# EAGLE board ZX81ExpCard (EAGLE 5.11)
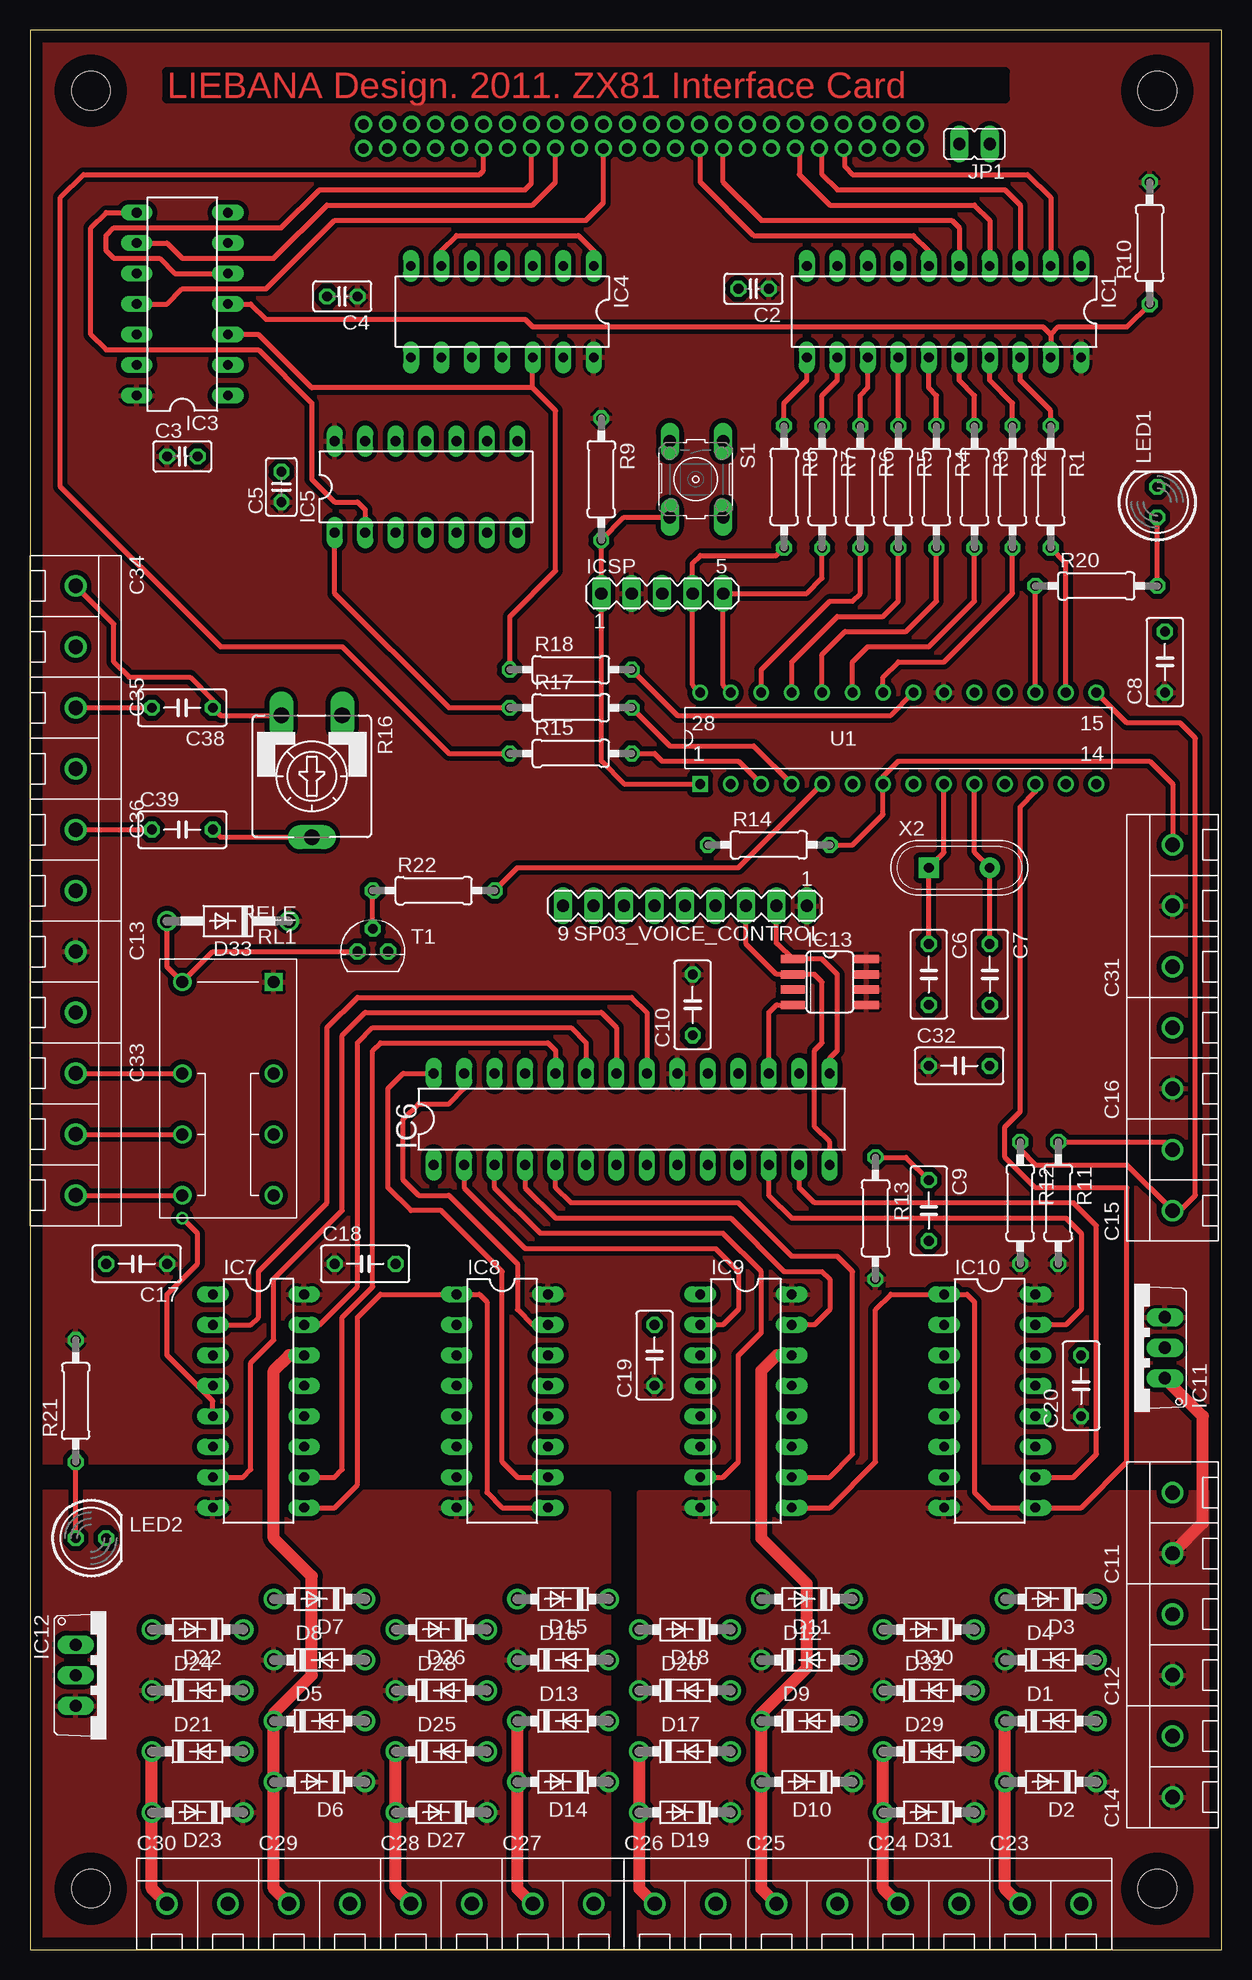
[diagram p0: board, top side]
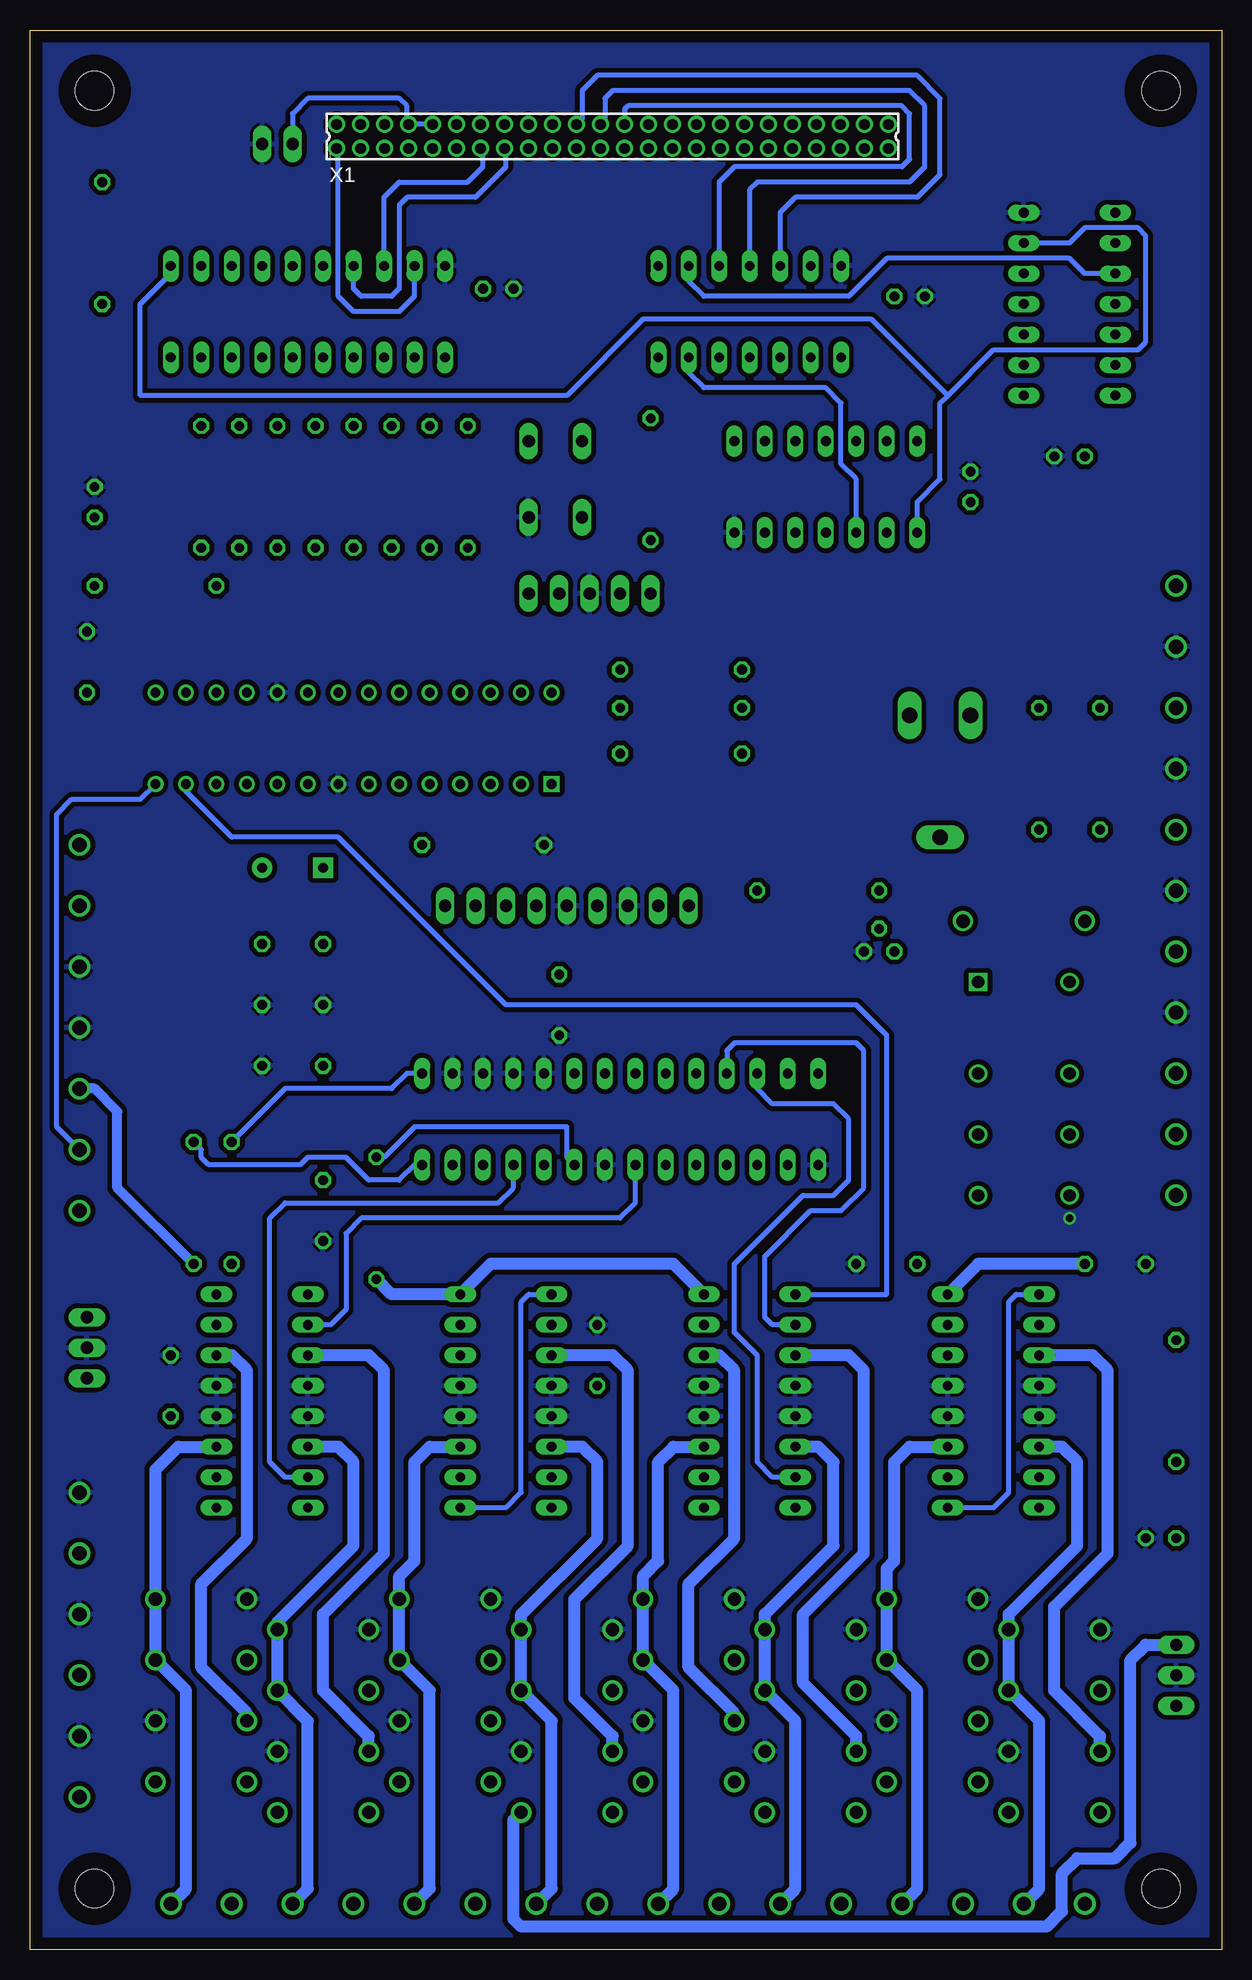
[diagram p1: board, bottom side, seen from below]

Size 99.36 x 160 mm. Coordinates in mm from the lower left corner, seen from the top.
Outline: 0,0 99.36,0 99.36,160 0,160 0,0
Copper layers (1*16): Top 0.035mm / dielectric 1.5mm / Bottom 0.035mm
Design rules "default *": minimum track width 16mil, minimum drill 24mil, track to track 16mil, track to pad 16mil, pad to pad 16mil, via to via 16mil, smd to smd 8mil, copper to edge 40mil, drill to drill 8mil, minimum pad ring 10mil, minimum via ring 8mil, stop-mask expansion 8mil, vias tented up to drill 0mil, thermal gap 10mil
Holes 3.2 mm at 5.08,5.08 93.98,5.08 93.98,154.94 5.08,154.94
tRestrict: area 2.1,2.1 to 8.1,8.1; area 91,2.1 to 97,8.1; area 91,151.9 to 97,157.9; area 2.1,151.9 to 8.1,157.9
bRestrict: area 2.1,2.1 to 8.1,8.1; area 91,2.1 to 97,8.1; area 91,151.9 to 97,157.9; area 2.1,151.9 to 8.1,157.9

## Footprints (pad centres in the part's own frame; a part is rotated, then mirrored left to right if it is on the bottom)
C025-025X050 = drill 0.813 octagon: 1 -1.27,0; 2 1.27,0
C050-030X075 = drill 0.813 octagon: 1 -2.54,0; 2 2.54,0
C2P = drill 1.2 pad 1.676 round: 1 0,0; 2 5.08,0
C3P = drill 1.2 pad 1.676 round: 1 0,0; 2 5.08,0; 3 10.16,0
DO41-7.6 = drill 1.1 pad 1.7 round: A 3.81,0; C -3.81,0
DO41-10 = drill 1.118 round: A 5.08,0; C -5.08,0
DIL20 = drill 0.813 long: 1 -11.43,-3.81; 2 -8.89,-3.81; 3 -6.35,-3.81; 4 -3.81,-3.81; 5 -1.27,-3.81; 6 1.27,-3.81; 7 3.81,-3.81; 8 6.35,-3.81; 9 8.89,-3.81; 10 11.43,-3.81; 11 11.43,3.81; 12 8.89,3.81; 13 6.35,3.81; 14 3.81,3.81; 15 1.27,3.81; 16 -1.27,3.81; 17 -3.81,3.81; 18 -6.35,3.81; 19 -8.89,3.81; 20 -11.43,3.81
DIL14 = drill 0.813 long: 1 -7.62,-3.81; 2 -5.08,-3.81; 3 -2.54,-3.81; 4 0,-3.81; 5 2.54,-3.81; 6 5.08,-3.81; 7 7.62,-3.81; 8 7.62,3.81; 9 5.08,3.81; 10 2.54,3.81; 11 0,3.81; 12 -2.54,3.81; 13 -5.08,3.81; 14 -7.62,3.81
DIL28-3 = drill 0.813 long: 1 -16.51,-3.81; 2 -13.97,-3.81; 3 -11.43,-3.81; 4 -8.89,-3.81; 5 -6.35,-3.81; 6 -3.81,-3.81; 7 -1.27,-3.81; 8 1.27,-3.81; 9 3.81,-3.81; 10 6.35,-3.81; 11 8.89,-3.81; 12 11.43,-3.81; 13 13.97,-3.81; 14 16.51,-3.81; 15 16.51,3.81; 16 13.97,3.81; 17 11.43,3.81; 18 8.89,3.81; 19 6.35,3.81; 20 3.81,3.81; 21 1.27,3.81; 22 -1.27,3.81; 23 -3.81,3.81; 24 -6.35,3.81; 25 -8.89,3.81; 26 -11.43,3.81; 27 -13.97,3.81; 28 -16.51,3.81
DIL16 = drill 0.813 long: 1 -8.89,-3.81; 2 -6.35,-3.81; 3 -3.81,-3.81; 4 -1.27,-3.81; 5 1.27,-3.81; 6 3.81,-3.81; 7 6.35,-3.81; 8 8.89,-3.81; 9 8.89,3.81; 10 6.35,3.81; 11 3.81,3.81; 12 1.27,3.81; 13 -1.27,3.81; 14 -3.81,3.81; 15 -6.35,3.81; 16 -8.89,3.81
TO220V = drill 1.016 long: 1 -2.54,-2.54; 2 0,-2.54; 3 2.54,-2.54
SO08 = smd 0.66 x 2.032: 1 -1.905,-3.073; 2 -0.635,-3.073; 3 0.635,-3.073; 4 1.905,-3.073; 5 1.905,3.073; 6 0.635,3.073; 7 -0.635,3.073; 8 -1.905,3.073
MA05-1 = drill 1.016 long: 1 -5.08,0; 2 -2.54,0; 3 0,0; 4 2.54,0; 5 5.08,0
JP2 = drill 1.016 long: 1 0,0; 2 2.54,0
LED5MM = drill 0.813 octagon: A -1.27,0; K 1.27,0
0207/10 = drill 0.813 octagon: 1 -5.08,0; 2 5.08,0
CA9V = drill 1.321 long: A -2.54,-5.08; E 2.54,-5.08; S 0,5.08
RELE = drill 1.016 square: 1 0,0 | drill 1.016 round: 2 0,7.62; 3 0,12.7; 4 0,17.78; 5 7.62,17.78; 6 7.62,12.7; 7 7.62,7.62; 8 7.62,0
PULSADOR-PEQUEÑO = drill 1.016 long: 1 0,0; 2 6.35,0; 3 0,-4.445; 4 6.35,-4.445
MA09-1 = drill 1.016 long: 1 -10.16,0; 2 -7.62,0; 3 -5.08,0; 4 -2.54,0; 5 0,0; 6 2.54,0; 7 5.08,0; 8 7.62,0; 9 10.16,0
TO92 = drill 0.813 octagon: 1 1.27,0; 2 0,1.905; 3 -1.27,0
DIL28 = drill 0.813 square: 1 0,0 | drill 0.813 round: 2 2.54,0; 3 5.08,0; 4 7.62,0; 5 10.16,0; 6 12.7,0; 7 15.24,0; 8 17.78,0; 9 20.32,0; 10 22.86,0; 11 25.4,0; 12 27.94,0; 13 30.48,0; 14 33.02,0; 15 33.02,7.62; 16 30.48,7.62; 17 27.94,7.62; 18 25.4,7.62; 19 22.86,7.62; 20 20.32,7.62; 21 17.78,7.62; 22 15.24,7.62; 23 12.7,7.62; 24 10.16,7.62; 25 7.62,7.62; 26 5.08,7.62; 27 2.54,7.62; 28 0,7.62
87758-4816 = drill 0.9 pad 1.27 round: 1 -23,-1; 2 -23,1; 3 -21,-1; 4 -21,1; 5 -19,-1; 6 -19,1; 7 -17,-1; 8 -17,1; 9 -15,-1; 10 -15,1; 11 -13,-1; 12 -13,1; 13 -11,-1; 14 -11,1; 15 -9,-1; 16 -9,1; 17 -7,-1; 18 -7,1; 19 -5,-1; 20 -5,1; 21 -3,-1; 22 -3,1; 23 -1,-1; 24 -1,1; 25 1,-1; 26 1,1; 27 3,-1; 28 3,1; 29 5,-1; 30 5,1; 31 7,-1; 32 7,1; 33 9,-1; 34 9,1; 35 11,-1; 36 11,1; 37 13,-1; 38 13,1; 39 15,-1; 40 15,1; 41 17,-1; 42 17,1; 43 19,-1; 44 19,1; 45 21,-1; 46 21,1; 47 23,-1; 48 23,1
XTAL-R = drill 0.813 pad 1.676 square: 1 0,0 | drill 0.813 pad 1.676 round: 2 5.08,0

## Placement (x,y rotation side)
C2  100nF  [C025-025X050]  60.33,138.43 180 top
C3  100nF  [C025-025X050]  12.7,124.46 0 top
C4  100nF  [C025-025X050]  26.04,137.79 180 top
C5  100nF  [C025-025X050]  20.95,121.92 90 top
C6  22pF  [C050-030X075]  74.93,81.28 270 top
C7  22pF  [C050-030X075]  80.01,81.28 270 top
C8  100nF  [C050-030X075]  94.61,107.31 90 top
C9  33pF  [C050-030X075]  74.93,61.59 270 top
C10  100nF  [C050-030X075]  55.24,78.74 90 top
C11  IN 12V  [C2P]  95.25,33.02 90 top
C12  OUT 12V ZX81  [C2P]  95.25,22.86 90 top
C13  OUT 5V Cassette  [C2P]  3.81,83.19 270 top
C14  OUT 12V Multipurpose  [C2P]  95.25,12.7 90 top
C15  I2C  [C2P]  95.25,61.59 90 top
C16  +5V I2C  [C2P]  95.25,71.75 90 top
C17  100nF  [C050-030X075]  8.89,57.15 180 top
C18  100nF  [C050-030X075]  27.94,57.15 0 top
C19  100nF  [C050-030X075]  52.07,49.53 90 top
C20  100nF  [C050-030X075]  87.63,46.99 90 top
C23  MOTOR8  [C2P]  82.55,3.81 0 top
C24  MOTOR7  [C2P]  72.39,3.81 0 top
C25  MOTOR6  [C2P]  62.23,3.81 0 top
C26  MOTOR5  [C2P]  52.07,3.81 0 top
C27  MOTOR4  [C2P]  41.91,3.81 0 top
C28  MOTOR3  [C2P]  31.75,3.81 0 top
C29  MOTOR2  [C2P]  21.59,3.81 0 top
C30  MOTOR1  [C2P]  11.43,3.81 0 top
C31  PIR  [C3P]  95.25,81.92 90 top
C32  100nF  [C050-030X075]  77.47,73.66 0 top
C33  RELAY  [C3P]  3.81,73.03 270 top
C34  TO AMPLIFIER  [C2P]  3.81,113.67 270 top
C35  SP03_VOICE_AUDIO  [C2P]  3.81,103.5 270 top
C36  TAPE_AUDIO  [C2P]  3.81,93.34 270 top
C38  100nF  [C050-030X075]  12.7,103.5 180 top
C39  100nF  [C050-030X075]  12.7,93.34 0 top
D1  1N5817-B  [DO41-7.6]  85.09,19.05 0 top
D2  1N5817-B  [DO41-7.6]  85.09,13.97 180 top
D3  1N5817-B  [DO41-7.6]  85.09,29.21 180 top
D4  1N5817-B  [DO41-7.6]  85.09,24.13 0 top
D5  1N5817-B  [DO41-7.6]  24.13,19.05 0 top
D6  1N5817-B  [DO41-7.6]  24.13,13.97 180 top
D7  1N5817-B  [DO41-7.6]  24.13,29.21 180 top
D8  1N5817-B  [DO41-7.6]  24.13,24.13 0 top
D9  1N5817-B  [DO41-7.6]  64.77,19.05 0 top
D10  1N5817-B  [DO41-7.6]  64.77,13.97 180 top
D11  1N5817-B  [DO41-7.6]  64.77,29.21 180 top
D12  1N5817-B  [DO41-7.6]  64.77,24.13 0 top
D13  1N5817-B  [DO41-7.6]  44.45,19.05 0 top
D14  1N5817-B  [DO41-7.6]  44.45,13.97 180 top
D15  1N5817-B  [DO41-7.6]  44.45,29.21 180 top
D16  1N5817-B  [DO41-7.6]  44.45,24.13 0 top
D17  1N5817-B  [DO41-7.6]  54.61,16.51 0 top
D18  1N5817-B  [DO41-7.6]  54.61,26.67 180 top
D19  1N5817-B  [DO41-7.6]  54.61,11.43 180 top
D20  1N5817-B  [DO41-7.6]  54.61,21.59 0 top
D21  1N5817-B  [DO41-7.6]  13.97,16.51 0 top
D22  1N5817-B  [DO41-7.6]  13.97,26.67 180 top
D23  1N5817-B  [DO41-7.6]  13.97,11.43 180 top
D24  1N5817-B  [DO41-7.6]  13.97,21.59 0 top
D25  1N5817-B  [DO41-7.6]  34.29,16.51 0 top
D26  1N5817-B  [DO41-7.6]  34.29,26.67 180 top
D27  1N5817-B  [DO41-7.6]  34.29,11.43 180 top
D28  1N5817-B  [DO41-7.6]  34.29,21.59 0 top
D29  1N5817-B  [DO41-7.6]  74.93,16.51 0 top
D30  1N5817-B  [DO41-7.6]  74.93,26.67 180 top
D31  1N5817-B  [DO41-7.6]  74.93,11.43 180 top
D32  1N5817-B  [DO41-7.6]  74.93,21.59 0 top
D33  1N4004  [DO41-10]  16.51,85.72 180 top
IC1  74HC245N  [DIL20]  76.2,136.53 180 top
IC3  74AC04N  [DIL14]  12.7,137.16 90 top
IC4  74LS11N  [DIL14]  39.37,136.53 180 top
IC5  7432N  [DIL14]  33.02,121.92 0 top
IC6  MCP23016DIL28  [DIL28-3]  50.16,69.22 0 top
IC7  L293D  [DIL16]  19.05,45.72 270 top
IC8  L293D  [DIL16]  39.37,45.72 270 top
IC9  L293D  [DIL16]  59.69,45.72 270 top
IC10  L293D  [DIL16]  80.01,45.72 270 top
IC11  7805TV  [TO220V]  92.08,50.16 90 top
IC12  7805TV  [TO220V]  6.35,22.86 270 top
IC13  STLM75M2F  [SO08]  66.67,80.64 270 top
ICSP  [MA05-1]  52.7,113.03 0 top
JP1  [JP2]  80.01,150.5 180 top
LED1  [LED5MM]  93.98,120.65 90 top
LED2  [LED5MM]  5.08,34.29 0 top
R1  100R  [0207/10]  85.09,121.92 270 top
R2  100R  [0207/10]  81.92,121.92 270 top
R3  100R  [0207/10]  78.74,121.92 270 top
R4  100R  [0207/10]  75.56,121.92 270 top
R5  100R  [0207/10]  72.39,121.92 270 top
R6  100R  [0207/10]  69.22,121.92 270 top
R7  100R  [0207/10]  66.04,121.92 270 top
R8  100R  [0207/10]  62.87,121.92 270 top
R9  4K7  [0207/10]  47.62,122.56 270 top
R10  4K7  [0207/10]  93.34,142.24 90 top
R11  4K7  [0207/10]  85.72,62.23 270 top
R12  4K7  [0207/10]  82.55,62.23 270 top
R13  3K9  [0207/10]  70.48,60.96 270 top
R14  10K  [0207/10]  61.59,92.08 0 top
R15  100R  [0207/10]  45.09,99.69 0 top
R16  10K  [CA9V]  23.5,97.79 180 top
R17  100R  [0207/10]  45.09,103.5 0 top
R18  100R  [0207/10]  45.09,106.68 0 top
R20  330R  [0207/10]  88.9,113.67 0 top
R21  330R  [0207/10]  3.81,45.72 90 top
R22  1K  [0207/10]  33.66,88.27 0 top
RL1  RELE  [RELE]  20.32,80.64 180 top
S1  [PULSADOR-PEQUEÑO]  57.78,125.73 270 top
SP03_VOICE_CONTROL  [MA09-1]  54.61,87 180 top
T1  BC547  [TO92]  28.57,83.19 0 top
U1  PIC18F2620  [DIL28]  55.88,97.16 0 top
X1  87758-4816  [87758-4816]  50.8,151.13 0 bottom
X2  20Mhz  [XTAL-R]  74.93,90.17 0 top

## Library data of the parts
C2-C10 C17-C20 C32 C38 C39 R1-R15 R17 R18 R20-R22 = rcl
C11-C16 C23-C31 C33-C36 JP1 RL1 S1 U1 = IEARobotics
D1-D33 = diode
IC1 IC3 IC4 = 74xx-eu
IC5 = 74xx-us
IC6 IC13 X2 = cruiser-consola
IC7-IC10 = st-microelectronics; MPN: L293D; OC_FARNELL: 9589619; OC_NEWARK: 56P8249
IC11 IC12 = linear
ICSP SP03_VOICE_CONTROL = con-lstb; OC_FARNELL: unknown; OC_NEWARK: unknown
LED1 LED2 = led
R16 = pot
T1 = transistor
X1 = con-molex; MPN: 87758-4816; OC_FARNELL: unknown; OC_NEWARK: 25M5696

## Nets
!MCLR: ICSP.1 R9.2 S1.4 U1.1
!MREQ: IC3.11 X1.27
!RD: IC3.9 X1.31
!WAIT: R15.1 X1.37
!WR: IC3.5 X1.33
+5V: C2.1 C3.1 C4.1 C5.1 C8.1 C10.2 C13.1 C16.1 C17.1 C18.1 C19.1 C20.1 C31.2 C32.1 D33.C IC1.20 IC3.14 IC4.14 IC5.14 IC6.20 IC7.16 IC8.16 IC9.16 IC10.16 IC11.3 IC13.5 IC13.6 IC13.7 IC13.8 ICSP.2 R9.1 R10.2 R11.2 R12.2 R13.2 R21.2 RL1.1 SP03_VOICE_CONTROL.1 U1.20
+12V: C11.1 C12.1 C14.1 D2.C D4.C D10.C D12.C D19.C D20.C D31.C D32.C IC9.8 IC10.8 IC11.1 IC12.1
ADR_BUS0: X1.14
ADR_BUS1: X1.16
ADR_BUS2: X1.18
ADR_BUS3: X1.20
ADR_BUS4: X1.44
ADR_BUS5: X1.42
ADR_BUS6: X1.40
ADR_BUS7: X1.38
ADR_BUS8: X1.36
ADR_BUS9: X1.34
ADR_BUS10: X1.32
ADR_BUS11: X1.30
ADR_BUS12: X1.28
ADR_BUS13: IC4.3 X1.26
ADR_BUS14: IC4.4 X1.24
ADR_BUS15: IC4.5 X1.22
DATA_BUS0: IC1.2 X1.7
DATA_BUS1: IC1.3 X1.9
DATA_BUS2: IC1.4 X1.11
DATA_BUS3: IC1.5 X1.17
DATA_BUS4: IC1.6 X1.19
DATA_BUS5: IC1.7 X1.15
DATA_BUS6: IC1.8 X1.13
DATA_BUS7: IC1.9 X1.1
DATA_LINE0: R1.2 U1.16
DATA_LINE1: R2.2 U1.22
DATA_LINE2: R3.2 U1.23
DATA_LINE3: R4.2 U1.24
DATA_LINE4: R5.2 U1.25
DATA_LINE5: R6.2 U1.26
DATA_LINE6: ICSP.5 R7.2 U1.27
DATA_LINE7: ICSP.4 R8.2 U1.28
GND: C2.2 C3.2 C4.2 C5.2 C6.2 C7.2 C8.2 C9.2 C10.1 C11.2 C12.2 C13.2 C14.2 C16.2 C17.2 C18.2 C19.2 C20.2 C31.1 C32.2 C34.2 C35.2 C36.2 D1.A D3.A D5.A D7.A D9.A D11.A D13.A D15.A D17.A D18.A D21.A D22.A D25.A D26.A D29.A D30.A IC1.10 IC3.7 IC4.7 IC5.7 IC6.1 IC6.8 IC6.16 IC6.17 IC6.18 IC6.19 IC7.4 IC7.5 IC7.12 IC7.13 IC8.4 IC8.5 IC8.12 IC8.13 IC9.4 IC9.5 IC9.12 IC9.13 IC10.4 IC10.5 IC10.12 IC10.13 IC11.2 IC12.2 IC13.4 ICSP.3 JP1.1 LED1.K LED2.K R14.1 S1.2 SP03_VOICE_CONTROL.5 SP03_VOICE_CONTROL.7 T1.1 U1.8 U1.19
LED: R20.1 U1.17
M1+: C30.1 D21.C D23.A IC7.3
M1-: C30.2 D22.C D24.A IC7.6
M2+: C29.1 D5.C D6.A IC7.14
M2-: C29.2 D7.C D8.A IC7.11
M3+: C28.1 D25.C D27.A IC8.3
M3-: C28.2 D26.C D28.A IC8.6
M4+: C27.1 D13.C D14.A IC8.14
M4-: C27.2 D15.C D16.A IC8.11
M5+: C26.1 D17.C D19.A IC9.3
M5-: C26.2 D18.C D20.A IC9.6
M6+: C25.1 D9.C D10.A IC9.14
M6-: C25.2 D11.C D12.A IC9.11
M7+: C24.1 D29.C D31.A IC10.3
M7-: C24.2 D30.C D32.A IC10.6
M8+: C23.1 D1.C D2.A IC10.14
M8-: C23.2 D3.C D4.A IC10.11
N$1: IC1.18 R1.1
N$2: IC1.17 R2.1
N$3: IC1.16 R3.1
N$4: IC1.15 R4.1
N$5: IC1.14 R5.1
N$6: IC1.13 R6.1
N$7: IC1.12 R7.1
N$8: IC1.11 R8.1
N$9: IC3.10 IC4.2
N$10: C6.1 U1.9 X2.1
N$11: C7.1 U1.10 X2.2
N$12: C9.1 IC6.9 R13.1
N$13: IC1.19 IC3.4 R10.1
N$14: IC4.1 IC4.6
N$15: JP1.2 X1.8 X1.10
N$16: LED2.A R21.1
N$19: D33.A RL1.8 T1.3
N$20: R22.1 T1.2
N$21: C33.3 RL1.5
N$22: IC3.8 IC5.2
N$23: IC4.13 IC5.3
N$24: C33.2 RL1.6
N$25: C33.1 RL1.7
N$26: C36.1 C39.1
N$27: C39.2 R16.S
N$28: C35.1 C38.2
N$29: LED1.A R20.2
N$30: C34.1 C38.1 R16.E
N$68: IC1.1 IC3.6 IC5.1 R17.1
N$70: IC3.3 IC4.12 R18.1
PIR_SIGNAL: C31.3 R14.2 U1.7
PWM1: IC7.1 IC7.9 IC8.1 IC8.9 U1.13
PWM2: IC9.1 IC9.9 IC10.1 IC10.9 U1.12
RELAY: R22.2 U1.5
S1M1: IC6.21 IC7.2
S1M2: IC6.23 IC7.15
S1M3: IC6.25 IC8.2
S1M4: IC6.27 IC8.15
S1M5: IC6.2 IC9.2
S1M6: IC6.4 IC9.15
S1M7: IC6.7 IC10.2
S1M8: IC6.12 IC10.15
S2M1: IC6.22 IC7.7
S2M2: IC6.24 IC7.10
S2M3: IC6.26 IC8.7
S2M4: IC6.28 IC8.10
S2M5: IC6.3 IC9.7
S2M6: IC6.5 IC9.10
S2M7: IC6.11 IC10.7
S2M8: IC6.13 IC10.10
SCL: C15.2 IC6.14 IC13.2 R11.1 SP03_VOICE_CONTROL.3 U1.14
SDA: C15.1 IC6.15 IC13.1 R12.1 SP03_VOICE_CONTROL.2 U1.15
VCC: D6.C D8.C D14.C D16.C D23.C D24.C D27.C D28.C IC7.8 IC8.8 IC12.3
ZX81_DIR: R17.2 U1.4
ZX81_READY: R18.2 U1.21
ZX81_WAIT: R15.2 U1.3

## Tracks (layer width: path | path; a pad name or v marks a point on that pad's centre or on a via)
!MCLR
  Top 0.406: S1.4 49.53,119.38 R9.2 ICSP.1 47.62,99.06 49.53,97.16 U1.1
!MREQ
  Top 0.406: IC3.11 11.43,137.16 12.7,138.43 19.68,138.43 25.4,144.15 46.35,144.15 47.8,145.59 X1.27
!RD
  Top 0.406: IC3.9 11.43,142.24 12.7,140.97 20.32,140.97 24.77,145.41 41.91,145.41 43.8,147.31 X1.31
!WAIT
  Top 0.406: X1.37 37.8,148.29 37.47,147.96 4.45,147.96 2.54,146.05 2.54,121.92 15.88,108.58 26.04,108.58 34.92,99.69 R15.1
!WR
  Top 0.406: IC3.5 12.06,139.7 10.79,140.97 6.99,140.97 6.35,141.6 6.35,142.88 6.99,143.51 20.95,143.51 24.13,146.69 41.27,146.69 41.8,147.21 X1.33
+5V
  Bottom 0.813: R11.2 92.08,63.5 92.08,69.85 93.98,71.75 C16.1
  Bottom 1.016: IC7.16 20.32,57.15 C17.1 | R13.2 69.22,54.61 IC9.16 60.96,57.15 45.72,57.15 IC8.16
  pour Top: -1.91,40.64 101.6,40.64 101.6,162.56 -1.91,162.56
+12V
  Top 1.016: IC11.1 97.79,44.45 97.79,35.56 C11.1
  Bottom 1.016: IC12.1 6.35,25.4 7.62,24.13 7.62,8.89 8.89,7.62 12.06,7.62 13.34,6.35 13.34,3.17 14.61,1.91 58.42,1.91 59.05,2.54 59.05,10.79 D19.C
  pour Top: 100.97,-3.17 50.8,-3.17 50.8,38.1 100.97,38.1
ADR_BUS13
  Bottom 0.406: IC4.3 41.91,147.32 40.64,148.59 26.67,148.59 26.04,149.22 26.04,153.03 26.67,153.67 49.53,153.67 49.8,153.4 X1.26
ADR_BUS14
  Bottom 0.406: IC4.4 39.37,146.69 38.73,147.32 26.04,147.32 24.77,148.59 24.77,153.67 26.04,154.94 50.8,154.94 51.44,154.31 51.44,152.5 X1.24
ADR_BUS15
  Bottom 0.406: IC4.5 36.83,144.78 35.56,146.05 25.4,146.05 23.5,147.96 23.5,154.31 25.4,156.21 52.07,156.21 53.34,154.94 53.34,152.59 X1.22
DATA_BUS0
  Top 0.406: IC1.2 85.09,146.05 83.19,147.96 68.58,147.96 67.94,148.59 67.94,149.99 X1.7
DATA_BUS1
  Top 0.406: IC1.3 82.55,145.41 81.28,146.69 67.31,146.69 66.04,147.96 66.04,149.89 X1.9
DATA_BUS2
  Top 0.406: IC1.4 80.01,144.15 78.74,145.41 66.67,145.41 64.14,147.96 64.14,149.79 X1.11
DATA_BUS3
  Top 0.406: IC1.5 77.47,143.51 76.83,144.15 60.96,144.15 57.78,147.32 57.78,150.12 X1.17
DATA_BUS4
  Top 0.406: IC1.6 74.93,141.6 73.66,142.88 60.33,142.88 55.88,147.32 55.88,150.05 X1.19
DATA_BUS5
  Bottom 0.406: IC1.7 72.39,138.43 71.75,137.79 69.22,137.79 68.58,138.43 68.58,145.41 67.94,146.05 62.23,146.05 59.69,148.59 59.69,150.02 X1.15
DATA_BUS6
  Bottom 0.406: IC1.8 69.85,146.05 68.58,147.32 62.87,147.32 61.59,148.59 61.59,149.93 X1.13
DATA_BUS7
  Bottom 0.406: IC1.9 67.31,137.79 68.58,136.53 72.39,136.53 73.66,137.79 73.66,149.99 X1.1
DATA_LINE0
  Top 0.406: R1.2 86.36,115.57 U1.16
DATA_LINE1
  Top 0.406: U1.22 71.12,106.05 72.39,107.31 76.2,107.31 81.92,113.03 R2.2
DATA_LINE2
  Top 0.406: R3.2 78.74,112.39 74.93,108.58 69.85,108.58 68.58,107.31 U1.23
DATA_LINE3
  Top 0.406: U1.24 66.04,107.95 67.94,109.86 73.03,109.86 75.56,112.39 R4.2
DATA_LINE4
  Top 0.406: R5.2 72.39,112.39 71.12,111.12 67.31,111.12 63.5,107.31 U1.25
DATA_LINE5
  Top 0.406: R6.2 69.22,113.03 68.58,112.39 66.67,112.39 60.96,106.68 U1.26
DATA_LINE6
  Top 0.406: U1.27 57.78,105.41 ICSP.5 64.77,113.03 66.04,114.3 R7.2
DATA_LINE7
  Top 0.406: R8.2 62.23,116.2 55.88,116.2 55.24,115.57 ICSP.4 55.24,105.41 U1.28
GND  (via drill 0.61)
  Top 0.406: IC13.4 62.23,78.74 61.59,78.11 IC6.17 | v12.7,60.96 13.97,59.69 13.97,57.15 11.43,54.61 11.43,49.53 15.24,45.72 IC7.5
  pour Bottom: -2.54,163.19 104.14,163.19 104.14,-5.08 -2.54,-5.08
LED
  Top 0.406: U1.17 R20.1
M1+
  Top 1.016: C30.1 10.16,5.08 D23.A D21.C
  Bottom 1.016: D21.C 10.16,17.78 13.97,21.59 13.97,28.57 9.53,33.02 9.53,48.26 10.79,49.53 IC7.3
M1-
  Bottom 1.016: C30.2 15.24,5.08 15.24,19.05 D24.A D22.C 17.78,27.94 12.06,33.66 12.06,40.64 13.34,41.91 IC7.6
M2+
  Top 1.016: C29.1 20.32,5.08 D6.A D5.C 20.32,19.68 23.5,22.86 23.5,31.11 20.32,34.29 20.32,48.26 21.59,49.53 IC7.14
M2-
  Bottom 1.016: C29.2 25.4,5.08 25.4,21.59 D8.A D7.C 27.94,31.75 27.3,32.38 27.3,40.64 26.04,41.91 IC7.11
M3+
  Top 1.016: C28.1 30.48,5.08 D27.A D25.C
  Bottom 1.016: D25.C 30.48,17.78 34.92,22.23 34.92,27.94 29.84,33.02 29.84,48.26 31.11,49.53 IC8.3
M3-
  Bottom 1.016: C28.2 35.56,5.08 35.56,19.05 D28.A D26.C 38.1,27.94 32.38,33.66 32.38,40.64 33.66,41.91 IC8.6
M4+
  Top 1.016: C27.1 40.64,5.08 D14.A D13.C
  Bottom 1.016: D13.C 40.64,19.68 44.45,23.5 44.45,30.48 40.64,34.29 40.64,48.26 41.91,49.53 IC8.14
M4-
  Bottom 1.016: C27.2 45.72,5.08 45.72,21.59 D16.A D15.C 48.26,31.11 46.99,32.38 46.99,40.64 45.72,41.91 IC8.11
M5+
  Top 1.016: C26.1 50.8,5.08 D19.A D17.C
  Bottom 1.016: D17.C 50.8,17.78 53.98,20.95 53.98,29.21 49.53,33.66 49.53,48.26 50.8,49.53 IC9.3
M5-
  Bottom 1.016: C26.2 55.88,5.08 55.88,19.05 D20.A D18.C 58.42,27.94 52.07,34.29 52.07,40.64 53.34,41.91 IC9.6
M6+
  Top 1.016: C25.1 60.96,5.08 D10.A D9.C 60.96,19.68 64.77,23.5 64.77,30.48 60.96,34.29 60.96,48.26 62.23,49.53 IC9.14
M6-
  Bottom 1.016: C25.2 66.04,5.08 66.04,21.59 D12.A D11.C 68.58,31.11 67.31,32.38 67.31,40.64 66.04,41.91 IC9.11
M7+
  Top 1.016: C24.1 71.12,5.08 D31.A D29.C
  Bottom 1.016: D29.C 71.12,17.78 74.93,21.59 74.93,27.94 69.85,33.02 69.85,48.26 71.12,49.53 IC10.3
M7-
  Bottom 1.016: C24.2 76.2,5.08 76.2,19.05 D32.A D30.C 78.74,27.3 72.39,33.66 72.39,40.64 73.66,41.91 IC10.6
M8+
  Top 1.016: C23.1 81.28,5.08 D2.A D1.C
  Bottom 1.016: D1.C 81.28,19.68 85.09,23.5 85.09,30.48 81.28,34.29 81.28,48.26 82.55,49.53 IC10.14
M8-
  Bottom 1.016: C23.2 86.36,5.08 86.36,21.59 D4.A D3.C 88.9,40.01 87,41.91 IC10.11
N$1
  Top 0.406: IC1.18 82.55,130.81 85.09,128.27 R1.1
N$2
  Top 0.406: IC1.17 80.01,130.81 81.92,128.91 R2.1
N$3
  Top 0.406: IC1.16 77.47,130.81 78.74,129.54 R3.1
N$4
  Top 0.406: IC1.15 74.93,130.18 75.56,129.54 R4.1
N$5
  Top 0.406: R5.1 IC1.14
N$6
  Top 0.406: IC1.13 69.85,130.18 69.22,129.54 R6.1
N$7
  Top 0.406: IC1.12 67.31,130.81 66.04,129.54 R7.1
N$8
  Top 0.406: IC1.11 64.77,130.81 62.87,128.91 R8.1
N$9
  Bottom 0.406: IC4.2 44.45,139.06 43.18,137.79 31.11,137.79 27.94,140.97 12.7,140.97 11.43,139.7 IC3.10
N$10
  Top 0.406: U1.9 76.2,91.44 X2.1 C6.1
N$11
  Top 0.406: U1.10 78.74,91.44 X2.2 C7.1
N$12
  Top 0.406: C9.1 73.03,66.04 R13.1
  Bottom 0.406: IC6.9 54.61,66.04 54.61,68.58 67.31,68.58 69.85,66.04 R13.1
N$13
  Top 0.406: R10.1 91.44,135.25 85.72,135.25 85.09,134.62 | 85.09,134.62 IC1.19 | 85.09,134.62 84.45,135.25 41.91,135.25 41.27,135.89 19.68,135.89 18.41,137.16 IC3.4
N$14
  Top 0.406: IC4.1 46.99,141.6 45.72,142.88 35.56,142.88 34.29,141.6 IC4.6
N$15
  Bottom 0.406: JP1.2 77.47,153.03 76.2,154.31 68.58,154.31 67.94,153.67 67.94,152.28 X1.8 X1.10
N$16
  Top 0.406: LED2.A R21.1
N$19
  Top 0.406: D33.A 11.43,81.92 RL1.8 15.24,83.19 T1.3
N$20
  Top 0.406: T1.2 R22.1
N$21
  Top 0.406: C33.3 RL1.5
N$22
  Top 0.406: IC3.8 6.35,144.78 5.08,143.51 5.08,134.62 6.35,133.35 19.05,133.35 23.5,128.91 23.5,122.56 25.4,120.65 27.3,120.65 27.94,120.02 IC5.2
N$23
  Bottom 0.406: IC5.3 30.48,122.56 31.75,123.83 31.75,128.91 33.02,130.18 43.18,130.18 44.45,131.44 IC4.13
N$24
  Top 0.406: C33.2 RL1.6
N$25
  Top 0.406: C33.1 RL1.7
N$26
  Top 0.406: C36.1 C39.1
N$27
  Top 0.406: C39.2 15.88,92.71 R16.S
N$28
  Top 0.406: C35.1 C38.2
N$29
  Top 0.406: R20.2 LED1.A
N$30
  Top 0.406: R16.E 15.88,102.87 C38.1 15.24,104.14 13.34,106.05 8.26,106.05 6.99,107.31 6.99,110.49 C34.1
N$68
  Top 0.406: IC5.1 25.4,113.03 34.92,103.5 R17.1
  Bottom 0.406: IC3.6 12.7,142.24 11.43,143.51 6.99,143.51 6.35,142.88 6.35,133.99 6.99,133.35 19.05,133.35 22.86,129.54 | 22.86,129.54 23.5,128.91 23.5,122.56 25.4,120.65 IC5.1 | 22.86,129.54 29.21,135.89 48.26,135.89 54.61,129.54 90.17,129.54 90.17,137.16 87.63,139.7 IC1.1
N$70
  Top 0.406: IC3.3 19.05,134.62 23.5,130.18 41.91,130.18 | 41.91,130.18 IC4.12 | 41.91,130.18 43.81,128.27 43.81,114.94 40.01,111.12 R18.1
PIR_SIGNAL
  Top 0.406: R14.2 68.58,92.08 71.12,94.61 U1.7 71.12,97.79 72.39,99.06 93.34,99.06 95.25,97.16 C31.3
PWM1
  Top 0.406: IC8.9 39.37,36.83 38.1,38.1 38.1,53.98 37.47,54.61 IC8.1 29.21,54.61 27.3,52.7 27.3,38.73 25.4,36.83 IC7.9
  Bottom 0.406: IC7.9 19.05,36.83 17.78,38.1 17.78,53.98 17.14,54.61 IC7.1 | IC8.1 27.94,54.61 27.94,76.2 30.48,78.74 59.69,78.74 73.66,92.71 82.55,92.71 86.36,96.52 U1.13
PWM2
  Top 0.406: IC9.9 66.67,36.83 70.48,40.64 70.48,53.34 71.75,54.61 IC10.1 78.11,54.61 78.74,53.98 78.74,38.1 80.01,36.83 IC10.9 87.63,36.83 91.44,40.64 91.44,63.5 83.82,63.5 81.28,66.04 81.28,68.58 82.55,69.85 82.55,95.25 83.82,96.52 U1.12
  Bottom 0.406: IC9.9 59.69,36.83 58.42,38.1 58.42,53.98 57.78,54.61 IC9.1
RELAY
  Top 0.406: U1.5 59.05,90.17 40.64,90.17 R22.2
S1M1
  Top 0.406: IC7.2 18.41,52.07 19.05,52.7 19.05,56.52 24.77,62.23 24.77,76.83 27.3,79.38 50.16,79.38 51.44,78.11 IC6.21
S1M2
  Top 0.406: IC7.15 24.13,52.07 27.3,55.24 27.3,75.56 28.57,76.83 45.09,76.83 46.35,75.56 IC6.23
S1M3
  Bottom 0.406: IC8.2 37.47,52.07 38.1,52.7 38.1,57.78 34.29,61.59 31.75,61.59 29.84,63.5 29.84,74.93 30.48,75.56 40.64,75.56 41.27,74.93 IC6.25
S1M4
  Top 0.406: IC8.15 41.91,52.07 40.64,53.34 40.64,57.15 34.92,62.87 32.38,62.87 31.11,64.14 31.11,69.22 32.38,70.48 34.92,70.48 36.2,71.75 IC6.27
S1M5
  Top 0.406: IC9.2 57.78,52.07 59.05,53.34 59.05,56.52 57.15,58.42 41.27,58.42 36.2,63.5 IC6.2
S1M6
  Top 0.406: IC9.15 65.41,52.07 66.67,53.34 66.67,55.88 66.04,56.52 62.87,56.52 58.42,60.96 43.81,60.96 41.27,63.5 IC6.4
S1M7
  Bottom 0.406: IC10.2 74.3,52.07 73.03,53.34 73.03,59.69 71.75,60.96 50.16,60.96 48.9,62.23 IC6.7
S1M8
  Top 0.406: IC10.15 86.36,52.07 87.63,53.34 87.63,59.69 86.36,60.96 63.5,60.96 61.59,62.87 IC6.12
S2M1
  Top 0.406: IC7.7 17.78,39.37 18.41,40.01 18.41,48.9 20.32,50.8 20.32,55.88 26.04,61.59 26.04,76.2 27.94,78.11 47.62,78.11 48.9,76.83 IC6.22
S2M2
  Top 0.406: IC7.10 25.4,39.37 26.04,40.01 26.04,52.7 28.57,55.24 28.57,74.93 29.21,75.56 43.18,75.56 43.81,74.93 IC6.24
S2M3
  Bottom 0.406: IC8.7 37.47,39.37 38.73,40.64 38.73,49.53 40.64,51.44 40.64,57.15 34.92,62.87 32.38,62.87 31.11,64.14 31.11,69.22 32.38,70.48 37.47,70.48 38.73,71.75 IC6.26
S2M4
  Top 0.406: IC8.10 40.64,39.37 39.37,40.64 39.37,56.52 34.29,61.59 31.75,61.59 29.84,63.5 29.84,71.75 31.11,73.03 IC6.28
S2M5
  Top 0.406: IC9.7 57.78,39.37 59.05,40.64 59.05,49.53 60.96,51.44 60.96,56.52 57.78,59.69 42.55,59.69 38.73,63.5 IC6.3
S2M6
  Top 0.406: IC9.10 66.67,39.37 68.58,41.27 68.58,56.52 67.31,57.78 63.5,57.78 59.05,62.23 45.09,62.23 43.81,63.5 IC6.5
S2M7
  Bottom 0.406: IC10.7 78.11,39.37 79.38,40.64 79.38,60.96 78.11,62.23 60.33,62.23 59.05,63.5 IC6.11
S2M8
  Top 0.406: IC10.10 87,39.37 88.9,41.27 88.9,60.33 87,62.23 65.41,62.23 64.14,63.5 IC6.13
SCL
  Top 0.406: C15.2 94.61,67.31 R11.1 | SP03_VOICE_CONTROL.3 59.69,83.82 62.23,81.28 IC13.2 65.41,81.28 66.04,80.64 66.04,75.56 65.41,74.93 65.41,68.58 66.67,67.31 IC6.14
  Bottom 0.406: U1.14 90.17,95.89 95.89,95.89 97.16,94.61 97.16,68.58 C15.2 | R11.1 85.09,66.67 85.09,66.04 84.45,65.41 76.83,65.41 76.2,66.04 73.03,66.04 71.12,64.14 68.58,64.14 67.31,65.41 IC6.14
SDA
  Top 0.406: R12.1 82.55,66.67 83.82,65.41 91.44,65.41 C15.1 95.89,61.59 97.16,62.87 97.16,100.97 95.89,102.23 91.44,102.23 U1.15 | SP03_VOICE_CONTROL.2 62.23,83.82 62.33,83.82 IC13.1 66.04,82.55 67.31,81.28 67.31,74.93 66.67,74.3 IC6.15
  Bottom 0.406: R12.1 78.11,71.75 69.22,71.75 67.94,73.03 IC6.15
VCC
  pour Top: -2.54,-2.54 48.26,-2.54 48.26,38.1 -2.54,38.1
ZX81_DIR
  Top 0.406: U1.4 60.33,100.33 53.34,100.33 R17.2
ZX81_READY
  Top 0.406: U1.21 71.75,102.87 53.98,102.87 R18.2
ZX81_WAIT
  Top 0.406: U1.3 59.05,99.06 52.7,99.06 52.07,99.69 R15.2

## Text on the board
Top: LIEBANA Design. 2011. ZX81 Interface Card